# Altium PCB MPU6050_PCB.PcbDoc
Units mm, origin at the board's own origin, x right, y up, seen from the top; angles counter-clockwise.
Board outline 18.5 x 30 mm, 2 copper layers (Top Layer, Bottom Layer), stack 1.571 mm thick; 16 components, 11 nets, 62 pads, 12 vias.
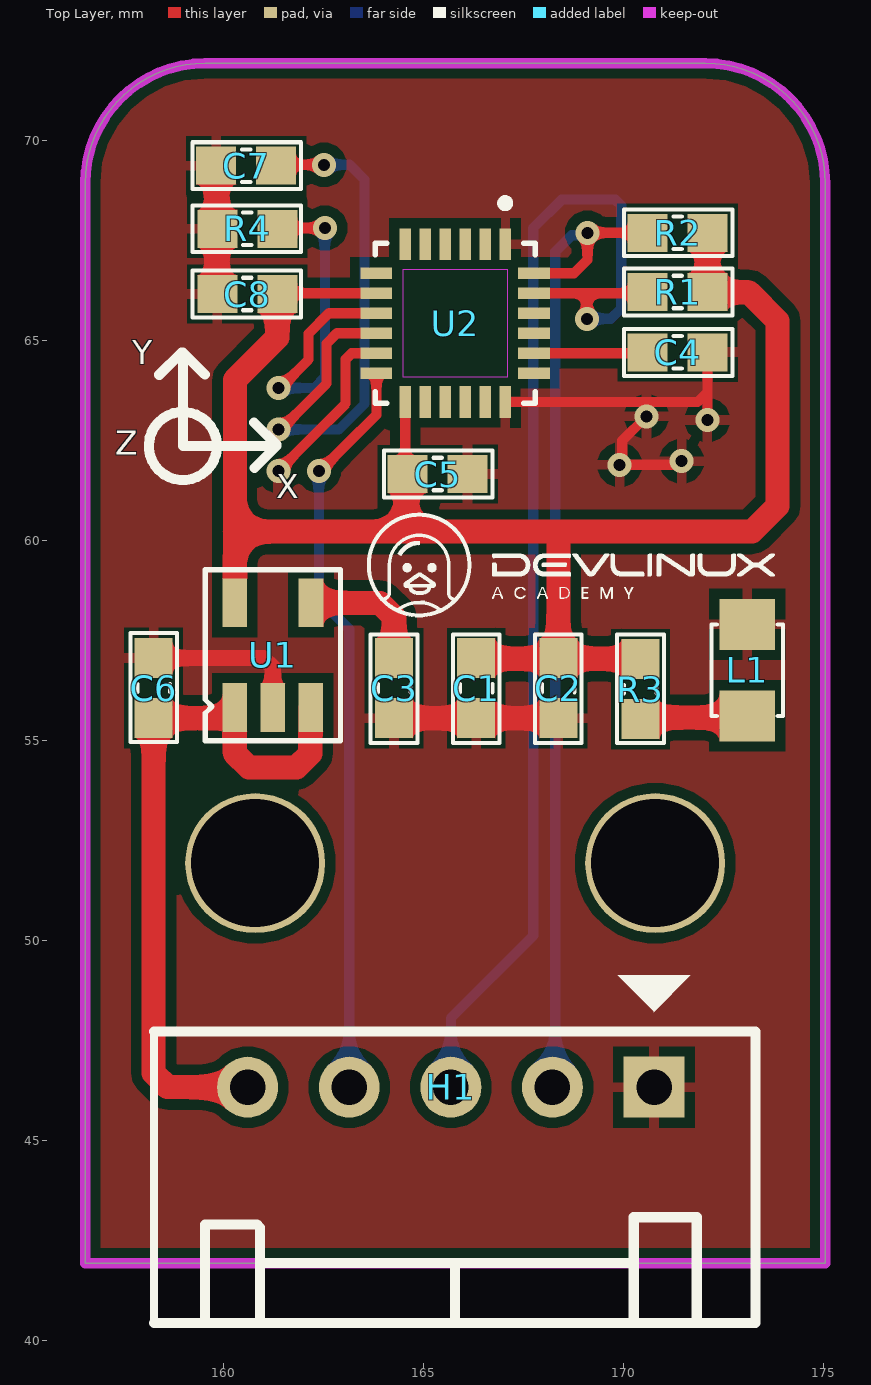
[diagram p0: Top Layer view]
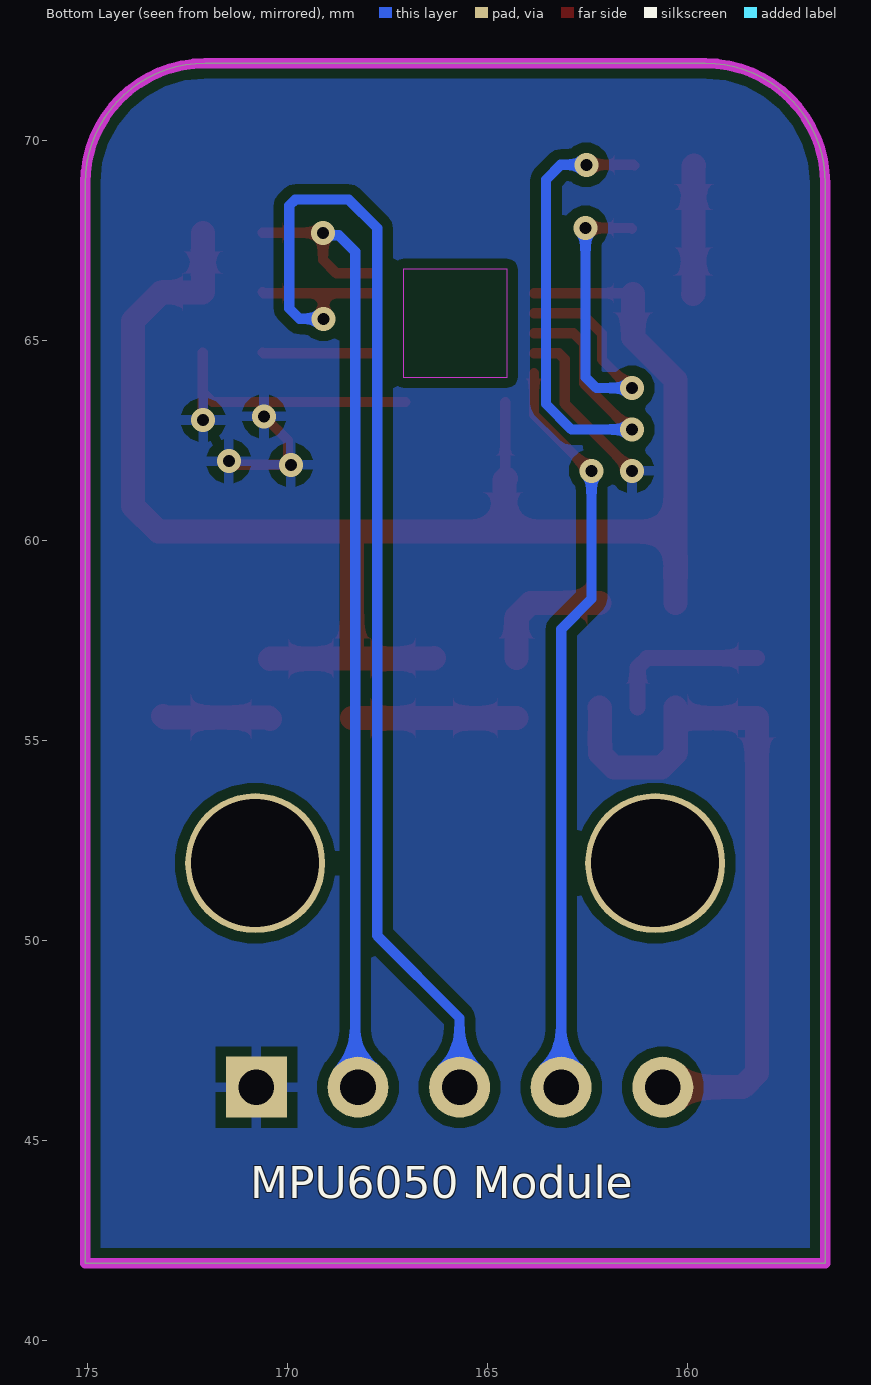
[diagram p1: Bottom Layer view, seen from below]
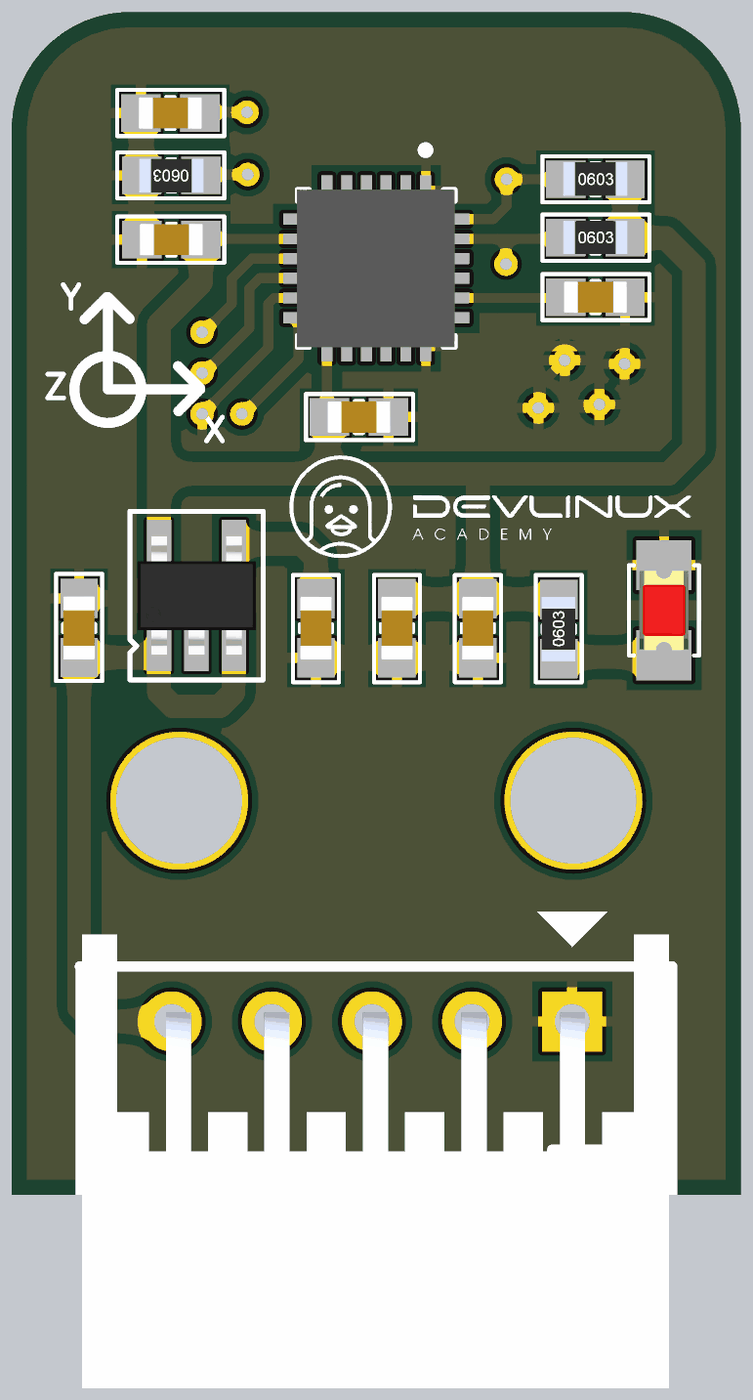
[diagram p2: 3D render of the assembled board from above, using the file's embedded part models]

## Layer stack, top to bottom
Top Solder: solder mask 0.0102, Solder Resist, Dk 3.5
Top Layer: signal copper 0.0356
Dielectric 1: dielectric 1.5, FR-4, Dk 4.8
Bottom Layer: signal copper 0.0356
Bottom Solder: solder mask 0.0102, Solder Resist, Dk 3.5

## Board outline
156.549,41.93 156.549,68.93 cw(c159.549,68.93) 159.549,71.93 172.049,71.93 cw(c172.049,68.93) 175.049,68.93 175.049,41.93

## Design rules (kind name [scope] priority, off if disabled: settings)
Clearance [All] p1: gap=0.254 ignorepadtopadclearanceinfootprint=FALSE except(0: Arc-Hole Track-Hole SMDPad-Hole THPad-Hole Via-Hole Fill-Hole Poly-Hole Region-Hole Text-Hole; 0.178: Arc-Arc Arc-Track Arc-SMDPad Arc-THPad Track-Track Track-SMDPad Track-THPad SMDPad-SMDPad SMDPad-THPad THPad-THPad)
PolygonConnect [All] p1: connectstyle=Relief reliefconductorwidth=0.254 reliefentries=4 polygonreliefangle="90 Angle" airgapwidth=0.254
RoomDefinition MPU6050 [InComponentClass('MPU6050')] p1: confinementstyle=ConfineIn formatcopy=TRUE lockcomponents=FALSE outline 178.943,26.924 259.715,26.924 259.715,45.085 178.943,45.085
RoutingVias [All] p1: holewidth=0.4 width=0.8 viastyle="Through Hole" minholewidth=0.3 minwidth=0.6 maxholewidth=0.5 maxwidth=1
SolderMaskExpansion [All] p1: expansion=0.102 istentingtop=FALSE
Width [All] p1: maxlimit=0.6 minlimit=0.254 preferedwidth=0.4
30 further rules are at their usual default settings.

## Components (designator, comment, footprint, x,y, rotation, side; value= is the part's Value field where it differs from the comment)
C1 "10uF" "tu 0603" 166.323,56.305 r270 top
C2 "100nF" "tu 0603" 168.377,56.305 r270 top
C3 "22nF" "tu 0603" 164.27,56.305 r270 top
C4 "2.2nF" "tu 0603" 171.36,64.7 r0 top
C5 "100nF" "tu 0603" 165.36,61.66 r0 top
C6 "100nF" "tu 0603" 158.26,56.31 r90 top
C7 "100nF" "tu 0603" 160.575,69.37 r0 top
C8 "100nF" "tu 0603" 160.6,66.16 r180 top
H1 "Header 5P 2.54 Duc Cong" "Header 5P DC 2.54" 170.77,46.33 r270 top
L1 "LED RED" LED-0805-Red 173.1,55.614 r90 top
R1 "4.7k" "tro smd 0603" 171.36,66.21 r0 top
R2 "4.7k" "tro smd 0603" 171.36,67.69 r0 top
R3 "330" "tro smd 0603" 170.43,56.28 r90 top
R4 "4.7k" "tro smd 0603" 160.6,67.79 r180 top
U1 "RT9193-33GB" SOT23-5 161.24,57.13 r0 top
U2 "MPU-6050-A" QFN50P400X400X95-24N 165.799,65.43 r270 top

## Footprints (in the part's own frame and the unit in brackets; to place one, negate y for a bottom-side part, rotate by r counter-clockwise, add the part's x,y. Pads: shape width x height; smd on the part's side, far side on the other; paste and mask are expansions set on the pad)
"Header 5P DC 2.54" [mil]
  rect 60x60 hole 35: 1(0,0)
  round 60 hole 35: 2(0,-100) 3(0,-200) 4(0,-300) 5(0,-400)
  silkscreen extent -110,-492 232,100, body extent -87,-490 366,97, height 240
LED-0805-Red [mil]
  rect 50x55 smd: 1(0,0) 2(90,0)
  silkscreen extent 0,-35 90,35, body extent 5,-25 85,25, height 43
QFN50P400X400X95-24N [mm]
  rect 0.79x0.28 smd: 1(-1.97,1.25) 2(-1.97,0.75) 3(-1.97,0.25) 4(-1.97,-0.25) 5(-1.97,-0.75) 6(-1.97,-1.25) 13(1.97,-1.25) 14(1.97,-0.75) 15(1.97,-0.25) 16(1.97,0.25) 17(1.97,0.75) 18(1.97,1.25)
  rect 0.28x0.79 smd: 7(-1.25,-1.97) 8(-0.75,-1.97) 9(-0.25,-1.97) 10(0.25,-1.97) 11(0.75,-1.97) 12(1.25,-1.97) 19(1.25,1.97) 20(0.75,1.97) 21(0.25,1.97) 22(-0.25,1.97) 23(-0.75,1.97) 24(-1.25,1.97)
  Keep-Out Layer region: 1.35,-1.3 -1.35,-1.3 -1.35,1.3 1.35,1.3
  silkscreen extent -3.1,-2 2,2, body extent -2,-2.01 2,1.99, height 0.93
SOT23-5 [mm] "CASE: SOT"
  rect 0.62x1.22 smd mask+0.076: 1(-0.953,-1.31) 2(-0.003,-1.31) 3(0.947,-1.31) 4(0.952,1.31) 5(-0.953,1.31)
  silkscreen extent -1.69,-2.14 1.69,2.14, body extent -1.5,-1.5 1.5,1.5, height 1.41
"tro smd 0603" [mm] "Chip Capacitor, 2-Leads, Body 1,60x0,80mm, IPC Medium Density"
  rect 1x0.95 smd mask+0.076: 1(-0.75,0) 2(0.75,0)
  silkscreen extent -1.35,-0.58 1.37,0.58, body extent -0.82,-0.42 0.82,0.43, height 0.44
"tu 0603" [mm] "Chip Capacitor, 2-Leads, Body 1,60x0,80mm, IPC Medium Density"
  rect 1x0.95 smd mask+0.076: 1(-0.75,0) 2(0.75,0)
  silkscreen extent -1.35,-0.58 1.37,0.58, body extent -0.8,-0.4 0.8,0.4, height 0.9

## Part data
C1: library part "Tu 0603 106 16V 20%", "Dán", Chung_Loai=Dán, Don_Vi=Con, Ma_Hang=MH004848, So_Chan=2, Ten_Linh_Kien="Tụ 0603-10uF 20% 16V"
C2 C3 C4 C5 C6 C7 C8: library part "Tu 0603 104 50V 10%", "Dán", Chung_Loai=Dán, Don_Vi=Con, Ma_Hang=MH004568, So_Chan=2, Ten_Linh_Kien="Tụ 0603 104-100nF 10% 50V"
H1: "Cắm", Chung_Loai=Cắm, Don_Vi=Con, Ma_Hang=MH001308, Ten_Linh_Kien="Header 5P XH2.54-5P Đực Cong"
L1: library part "LED 0805 Do", "Dán", Chung_Loai=Dán, Don_Vi=Con, Ma_Hang=MH000897, Ten_Linh_Kien="LED 0805 Màu Đỏ (Red)"
R1 R2 R4: library part "Tro 0603 5% 4.7k", "Dán", Chung_Loai=Dán, Don_Vi=Con, Ma_Hang=MH006327, So_Chan=2, Ten_Linh_Kien="Trở 0603 5% 4.7k"
R3: library part "Tro 0603 1% 1k", "Dán", Chung_Loai=Dán, Don_Vi=Con, Ma_Hang=MH006334, So_Chan=2, Ten_Linh_Kien="Trở 0603 1% 1k"
U1: library part REG_5.5V-3.3V-0.3A-1W-SOT-23-5, "Linear Voltage Regulator IC 1 Output 300mA SOT-23-5", Alternate Part Number-1=NA, Case/Package=SOT-23-5, Manufacturer="Richtek USA Inc.", Supplier Part Number-1=C15651, Manufacturer Part Number=RT9193-33GB, Supplier-1=LCSC
U2: Package=None, Check_prices=https://www.snapeda.com/parts/MPU-6050-A/InvenSense/view-part/?ref=eda, MF="TDK InvenSense", MP=MPU-6050-A, SnapEDA_Link=https://www.snapeda.com/parts/MPU-6050-A/InvenSense/view-part/?ref=snap

## Free pads (board coordinates)
  round 3.5 hole 3.2: 5(160.799,51.93) 5(170.799,51.93)

## Via types
v1: diameter 0.6, hole 0.3, Top Layer to Bottom Layer, 12 vias

## Nets (pads, with @x,y where several pads share a name; then routed paths per layer and width w, separated by ;. In a path a pad name is that pad's centre, name@x,y a point inside that pad or via, vN(x,y) a via of type N, cw(c..) or ccw(c..) an arc to the next point about the centre after c; other vN are vias at no path point)
+3V3: C1.1 C2.1 C5.1 C8.1 R1.2 R2.2 R3.2 U1.5 U2.8 U2.13 | length 42.9
  Top Layer w0.254: C8.1@161.59,66.18 U2.8 ; C5.1@164.549,61.569 U2.13
  Top Layer w0.6: U1.5 160.287,60.22 ; C8.1 161.35,65.07 160.287,64.007 160.287,60.22 ; C5.1@164.53,61.55 164.57,61.51 164.57,60.22 ; C1.1 166.336,57.043 168.377,57.043 170.417,57.043 R3.2 ; C2.1 168.377,60.153 168.31,60.22 ; R2.2 R1.2 172.119,66.201 173.149,66.201 173.86,65.49 173.86,60.86 173.22,60.22 168.31,60.22 ; 160.287,60.22 164.57,60.22 ; 164.57,60.22 168.31,60.22
+5: C6.1 H1.5 U1.1 U1.3 | length 18.1
  Top Layer w0.6: H1.5 158.611,46.33 158.26,46.681 C6.1 160.277,55.56 160.287,55.57 U1.1 160.287,54.671 160.639,54.32 161.826,54.32 162.177,54.671 162.177,55.81 U1.3
GND: C1.2 C2.2 C3.2 C4.2 C5.2 C6.2 C7.1 C8.2 H1.1 L1.2 R4.2 U1.2 U2.1 U2.11 U2.18 | length 25.7
  Top Layer w0.254: v1(161.38,61.74) 162.15,62.51 163.06,63.42 163.06,64.531 163.209,64.68 U2.11 ; U2.18 171.86,63.46 172.11,63.71 ; v1(170.58,63.1) 169.976,62.496 169.976,61.956 v1(169.91,61.89) 171.37,61.89 v1(171.46,61.98) ; v1(172.1,63.01) 172.11,63.02 172.11,63.71 ; C4.2 172.11,63.71
  Top Layer w0.4: C6.2 161.003,57.06 161.237,56.826 U1.2
  Top Layer w0.6: C7.1 159.837,69.357 159.837,66.173 C8.2 ; C3.2 C1.2 C2.2
INT: H1.4 U2.12 | length 18.8
  Top Layer w0.254: v1@162.39,61.7 163.053,62.363 163.829,63.139 U2.12
  Bottom Layer w0.254: v1(162.39,61.74) 162.39,58.54 163.15,57.78 H1.4
NetC3_1: C3.1 U1.4 | length 3.3
  Top Layer w0.6: U1.4 163.919,58.44 164.27,58.088 C3.1
NetC4_1: C4.1 U2.20 | length 2.8
  Top Layer w0.254: U2.20 170.59,64.68 C4.1
NetC7_2: C7.2 U2.10 | length 14.4
  Top Layer w0.254: C7.2 161.345,69.39 v1(162.52,69.39) ; v1@161.41,62.75 162.58,63.92 162.58,64.92 162.84,65.18 U2.10
  Bottom Layer w0.254: v1(161.38,62.775) 162.895,62.775 163.53,63.41 163.53,69.02 163.16,69.39 v1(162.52,69.39)
NetL1_1: L1.1 R3.1 | length 2.7
  Top Layer w0.6: R3.1 170.472,55.572 173.058,55.572 L1.1
NetR4_1: R4.1 U2.9 | length 9.7
  Top Layer w0.254: R4.1@161.38,67.79 161.4,67.81 v1(162.54,67.81) ; v1@161.42,63.81 162.13,64.52 162.13,65.17 162.64,65.68 U2.9
  Bottom Layer w0.254: v1(161.38,63.81) 162.27,63.81 162.54,64.08 v1(162.54,67.81)
SCL: H1.3 R1.1 U2.23 | length 31.9
  Top Layer w0.254: U2.23 169.09,66.18 ; v1(169.09,65.54) 169.09,66.18 ; R1.1@170.62,66.21 170.59,66.18 169.09,66.18
  Bottom Layer w0.254: H1.3 165.69,48.06 167.75,50.12 167.75,67.81 168.46,68.52 169.801,68.52 169.95,68.371 169.95,65.8 169.69,65.54 v1(169.09,65.54)
SDA: H1.2 R2.1 U2.24 | length 25.6
  Top Layer w0.254: U2.24 168.77,66.68 169.106,67.016 v1(169.106,67.69) R2.1
  Bottom Layer w0.254: H1.2 168.3,46.4 168.3,67.22 168.711,67.631 169.047,67.631 v1(169.106,67.69)
pads on no net: U2.2 U2.3 U2.4 U2.5 U2.6 U2.7 U2.14 U2.15 U2.16 U2.17 U2.19 U2.21 U2.22

## Polygon pours and split planes (outlines as drawn)
GND on Bottom Layer "GND_L02_P001" (solid, remove dead copper, pour order 1): 152.11,76.08 152.67,75.52 180.56,75.52 180.56,39.19 177.76,36.39 177.55,36.6 150.93,36.6
GND on Top Layer "GND_L01_P000" (solid, remove dead copper, pour order 0): 153.58,74.89 155.6,72.87 179.44,72.87 179.44,37.37 175.87,33.8 173.84,35.83 151.41,35.83 151.69,35.55

## Keep-outs
Keep-Out Layer:
  the board outline again, w0.254

## Silkscreen, mask and mechanical layers (free items; w line width, h text height)
Top Overlay:
  drawing of 29 lines, arcs and shapes, not listed
  text "Y" at 157.72,64.41 h0.6
  text "Z" at 157.3,62.14 h0.6
  text "X" at 161.33,61.05 h0.6
Bottom Overlay:
  text "MPU6050 Module" at 170.92,43.55 h0.8